# Altium PCB pcb_power_ass.PcbDoc
Units mm, origin at the board's own origin, x right, y up, seen from the top; angles counter-clockwise.
Board outline 23.73 x 24.13 mm, 2 copper layers (Top Layer, Bottom Layer), stack 0.8 mm thick; 3 components, 2 nets, 16 pads, 37 vias.
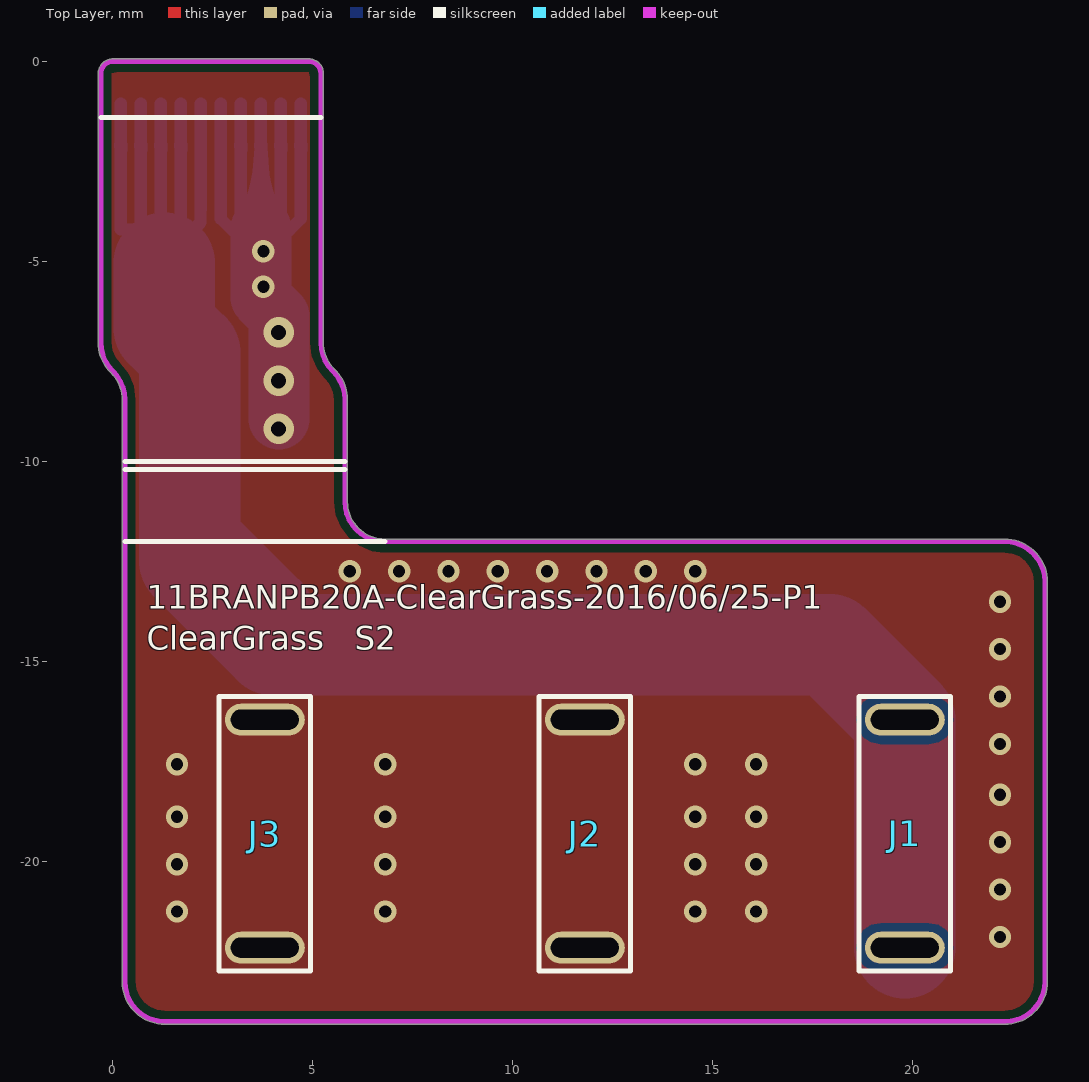
[diagram p0: Top Layer view]
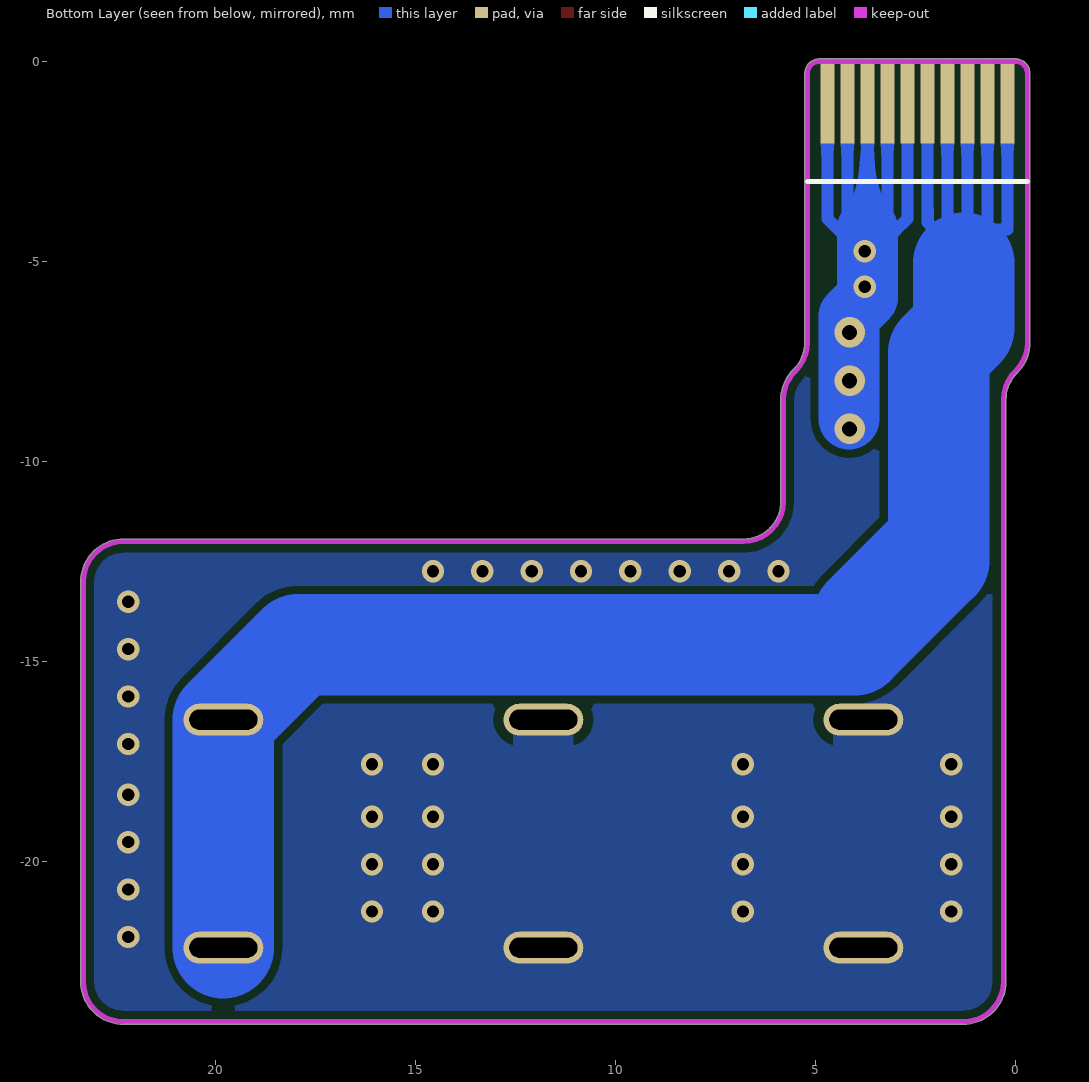
[diagram p1: Bottom Layer view, seen from below]

## Layer stack, top to bottom
Top Solder: solder mask 0.0102, Solder Resist, Dk 3.5
Top Layer: signal copper 0.0356
Dielectric1: core 0.729, FR-4, Dk 4.8
Bottom Layer: signal copper 0.0356
Bottom Solder: solder mask 0.0102, Solder Resist, Dk 3.5

## Board outline
0.236,-23.007 0.236,-8.459 cw(c0.3,-8.459) 0.236,-8.458 cw(c-0.7,-8.459) 0.236,-8.459 0.236,-8.458 ccw(c-0.7,-8.459) -0.044,-7.791 ccw(c-0.7,-8.459) -0.045,-7.79 ccw(c0,-7.744) -0.044,-7.791 -0.045,-7.79 cw(c0.7,-7.03) -0.364,-7.03 -0.364,-0.3 cw(c0,-0.3) 0,0.064 cw(c0,0) 0.001,0.064 4.9,0.064 cw(c4.9,-0.3) 5.264,-0.3 cw(c5.2,-0.3) 5.264,-0.301 5.264,-7.03 ccw(c6.2,-7.03) 5.544,-7.698 ccw(c6.2,-7.03) 5.545,-7.699 ccw(c5.5,-7.744) 5.544,-7.698 5.545,-7.699 cw(c4.8,-8.459) 5.864,-8.459 5.864,-11.007 ccw(c6.8,-11.007) 6.8,-11.943 22.3,-11.943 cw(c22.3,-13.007) 23.364,-13.007 23.364,-23.007 cw(c22.3,-23.007) 22.3,-24.071 1.3,-24.071 cw(c1.3,-23.007)

## Design rules (kind name [scope] priority, off if disabled: settings)
Clearance [All] p1: gap=0.203
HoleToHoleClearance [All] p1: gap=0 allowstackedmicrovias=TRUE
PolygonConnect [All] p1: connectstyle=Relief reliefconductorwidth=1.5 reliefentries=4 polygonreliefangle="90 Angle" airgapwidth=0.254
RoutingVias [All] p1: holewidth=0.711 width=1.27 viastyle="Through Hole" minholewidth=0.305 minwidth=0.559 maxholewidth=0.711 maxwidth=1.27
SilkToSilkClearance [All] p1: silktosilkclearance=0
SilkToSolderMaskClearance SilkscreenOverComponentPads [IsPad] p1: minsilkscreentomaskgap=0 clearancetoexposedcopper=TRUE
SolderMaskExpansion [All] p1: expansion=0.102
Width [All] p1: maxlimit=2.54 minlimit=0.203 preferedwidth=0.254
27 further rules are at their usual default settings.

## Components (designator, comment, footprint, x,y, rotation, side; value= is the part's Value field where it differs from the comment)
J1 "Coupler" "Charge_Coupler - 1" 19.8,-19.307 r0 top
J2 "Coupler" "Charge_Coupler - 1" 11.8,-19.307 r0 top locked
J3 "Coupler" "Charge_Coupler - 1" 3.8,-19.307 r0 top locked

## Footprints (in the part's own frame and the unit in brackets; to place one, negate y for a bottom-side part, rotate by r counter-clockwise, add the part's x,y. Pads: shape width x height; smd on the part's side, far side on the other; paste and mask are expansions set on the pad)
"Charge_Coupler - 1" [mm]
  oval 2x0.8 hole 0.5 slot 1.7 at 0 deg: 1(0,-2.85) 1(0,2.85)
  silkscreen extent -1.14,-3.43 1.14,3.43, body extent -1.1,-3.35 1.1,3.35, height 1.35

## Part data
J1 J2 J3: "厂家：待定；"

## Free pads (board coordinates)
  rect 0.35x2 smd far side: 1(0.2,-1.05) 2(0.7,-1.05) 3(1.2,-1.05) 4(1.7,-1.05) 5(2.2,-1.05) 6(2.7,-1.05) 7(3.2,-1.05) 8(3.7,-1.05) 9(4.2,-1.05) 10(4.7,-1.05)

## Via types
v1: diameter 0.559, hole 0.305, Top Layer to Bottom Layer, tented both sides, 34 vias
v2: diameter 0.762, hole 0.381, Top Layer to Bottom Layer, tented both sides, 3 vias

## Nets (pads, with @x,y where several pads share a name; then routed paths per layer and width w, separated by ;. In a path a pad name is that pad's centre, name@x,y a point inside that pad or via, vN(x,y) a via of type N, cw(c..) or ccw(c..) an arc to the next point about the centre after c; other vN are vias at no path point)
GND: J2.1 J3.1 pad.6 pad.7 pad.8 pad.9 pad.10 | length 20.8
  Bottom Layer w0.305: pad.6 2.7,-3.935 3.002,-4.237 ; 3.2,-4.166 pad.7 ; 3.7,-4.174 pad.8 ; 4.2,-4.038 pad.9 ; 4.399,-4.237 4.7,-3.936 pad.10
  Bottom Layer w1.524: 3.7,-4.174 3.7,-5.641 3.7,-5.908 4.154,-6.362 v2@4.154,-8.945
  other v1: 22.179,-21.89 1.605,-21.255 6.812,-21.255 14.559,-21.255 16.083,-21.255 22.179,-20.705 1.605,-20.07 6.812,-20.07 14.559,-20.07 16.083,-20.07 22.179,-19.519 1.605,-18.884 6.812,-18.884 14.559,-18.884 16.083,-18.884 22.179,-18.334 1.605,-17.572 6.812,-17.572 14.559,-17.572 16.083,-17.572 22.179,-17.064 22.179,-15.879 22.179,-14.693 22.179,-13.508 5.923,-12.746 7.157,-12.746 8.39,-12.746 9.624,-12.746 10.858,-12.746 12.092,-12.746 13.325,-12.746 14.559,-12.746 3.764,-5.634 3.764,-4.745
  other v2: 4.145,-9.19 4.145,-7.983 4.145,-6.777
LOAD_5V: J1.1 pad.1 pad.2 pad.3 pad.4 pad.5 | length 51.9
  Bottom Layer w0.305: pad.1 0.2,-4.207 0.7,-4.207 pad.2 ; 1.2,-4.207 pad.3 ; 1.7,-4.205 pad.4 ; 2.016,-4.207 2.192,-4.031 2.192,-3.705 ; 2.2,-3.705 pad.5
  Bottom Layer w2.54: 1.288,-5.05 1.288,-6.657 1.919,-7.288 1.919,-12.015 ; 3.792,-13.889 1.919,-12.015 ; J1.1@19.8,-22.157 19.8,-16.457 17.927,-14.584 4.018,-14.584 1.919,-12.484 1.919,-12.015

## Polygon pours and split planes (outlines as drawn)
GND on Top Layer "TOP-No Net 1" (solid, remove dead copper, pour order 0): -2.332,0.716 -2.205,0.589 8.209,0.589 8.209,-11.476 8.463,-11.73 8.844,-11.349 23.068,-11.349 23.195,-11.349 24.465,-12.619 23.83,-13.254 23.83,-24.684 -1.189,-24.684 -1.443,-24.938
GND on Bottom Layer "TOP-No Net 1" (solid, remove dead copper, pour order 4): -1.443,0.843 6.431,0.843 6.812,0.462 6.939,0.335 6.939,-11.476 23.703,-11.476 23.83,-11.603 23.83,-24.811 -0.681,-24.811

## Keep-outs
Keep-Out Layer:
  lines w0.127: -0.3,-7.03 ccw(c0.7,-7.03) 0,-7.744 cw(c-0.7,-8.459) 0.3,-8.459 0.3,-10 0.3,-10.207 0.3,-23.007 ccw(c1.3,-23.007) 1.3,-24.007 22.3,-24.007 ccw(c22.3,-23.007) 23.3,-23.007 23.3,-13.007 ccw(c22.3,-13.007) 22.3,-12.007 6.8,-12.007 cw(c6.8,-11.007) 5.8,-11.007 5.8,-10.207 5.8,-10 5.8,-8.459 ccw(c4.8,-8.459) 5.5,-7.744 cw(c6.2,-7.03) 5.2,-7.03 5.2,-0.3 ccw(c4.9,-0.3) 4.9,0 0,0 ccw(c0,-0.3) -0.3,-0.3 -0.3,-7.03

## Silkscreen, mask and mechanical layers (free items; w line width, h text height)
Top Overlay:
  lines w0.127: -0.3,-1.4 5.2,-1.4 ; 0.3,-12.007 6.8,-12.007 ; 0.3,-10.207 5.8,-10.207 ; 0.3,-10 5.8,-10
  text "11BRANPB20A-ClearGrass-2016/06/25-P1" at 0.843,-13.889 h1.02
  text "ClearGrass" at 0.843,-14.905 h1.02
  text "S2" at 6.05,-14.905 h1.02
Bottom Overlay:
  lines w0.127: -0.3,-3 5.2,-3